# Altium PCB PCB_1_layer.PcbDoc
Units mm, origin at the board's own origin, x right, y up, seen from the top; angles counter-clockwise.
Board outline 56.39 x 40.39 mm, 2 copper layers (Top Layer, Bottom Layer); 13 components, 9 nets, 33 pads, 1 vias.
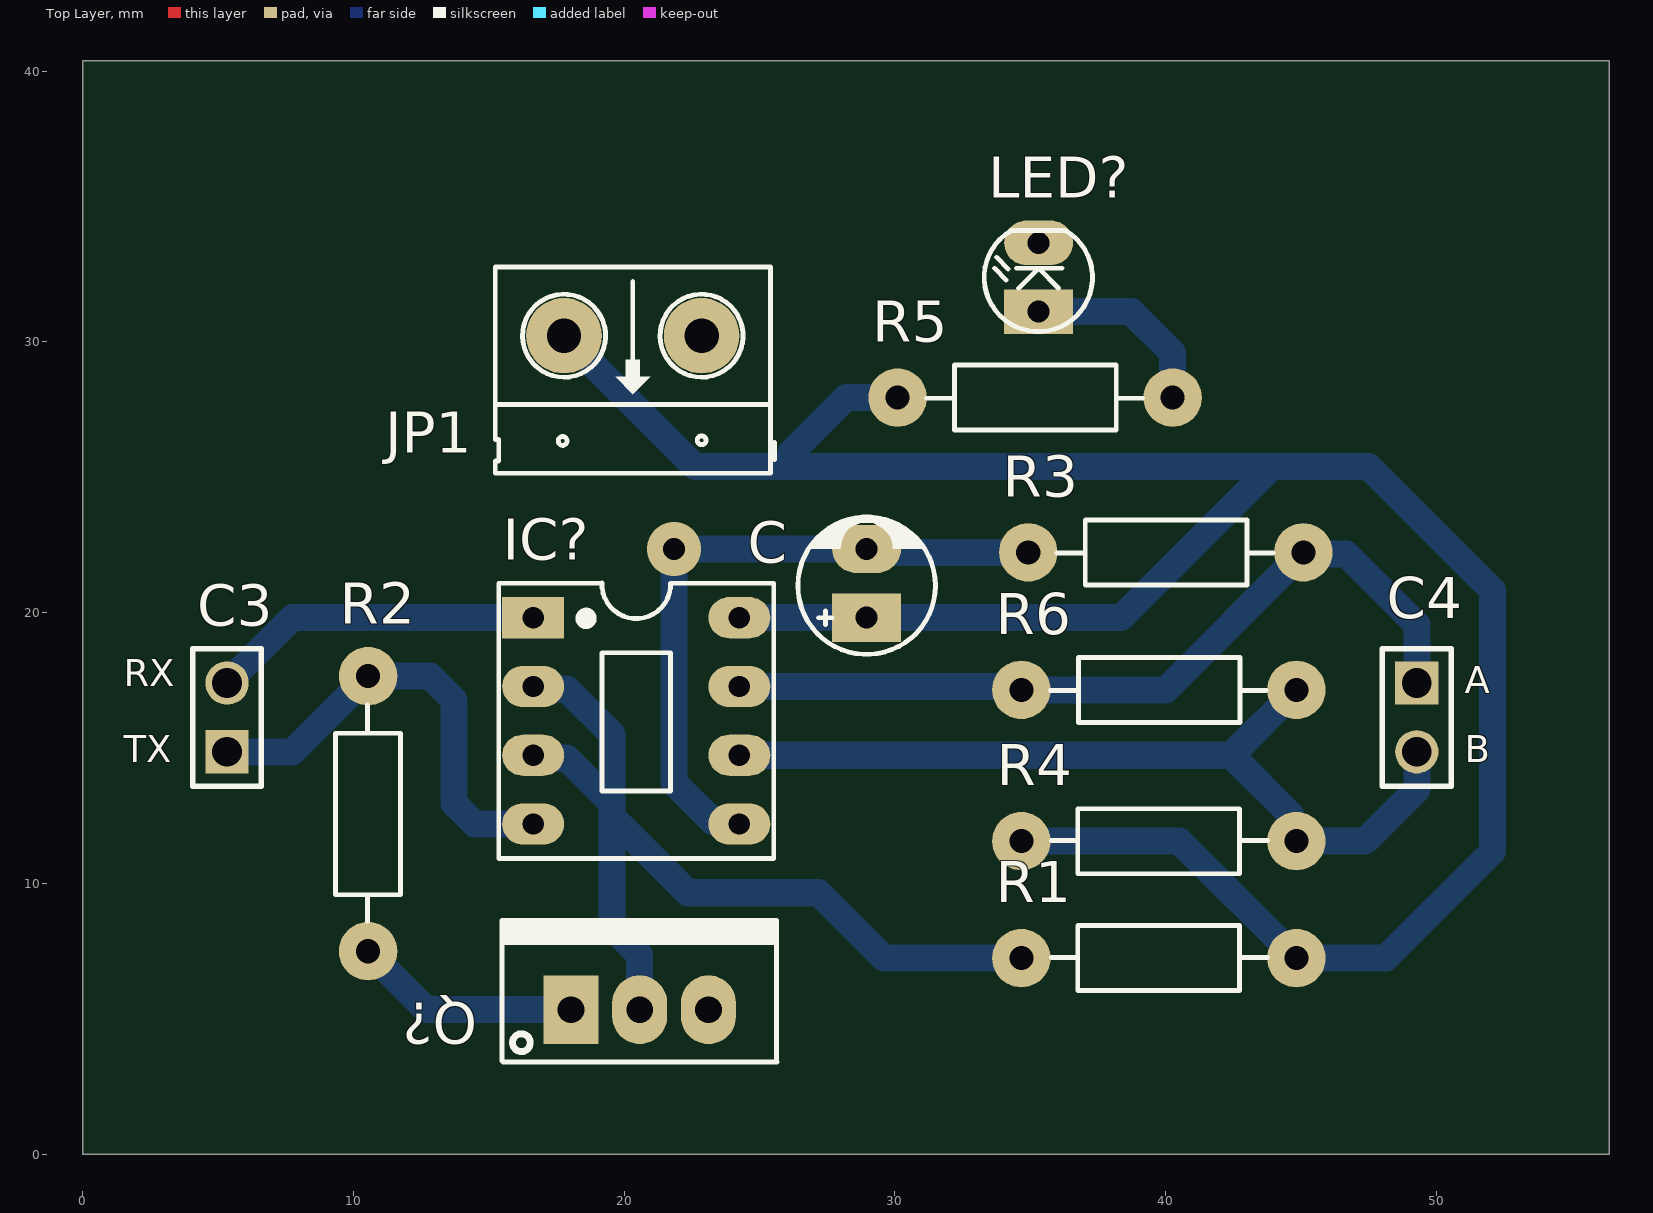
[diagram p0: Top Layer view]
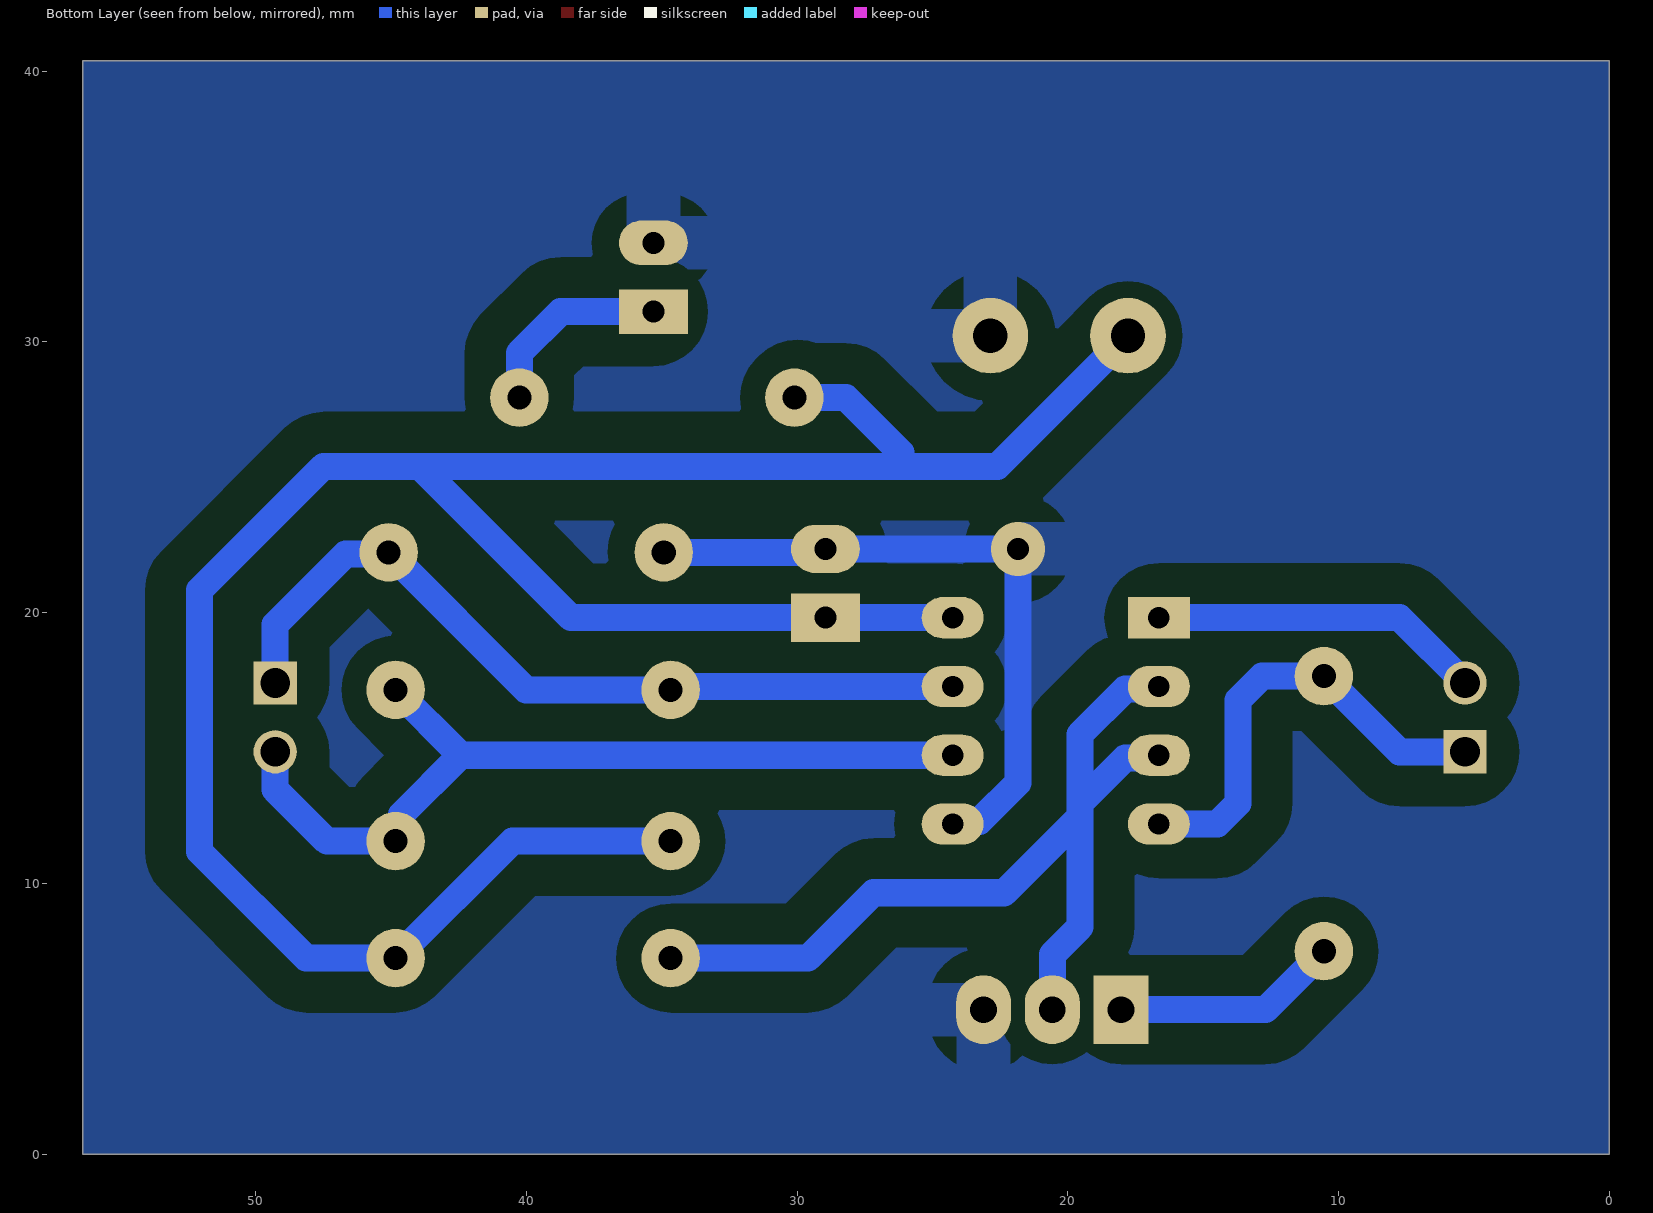
[diagram p1: Bottom Layer view, seen from below]
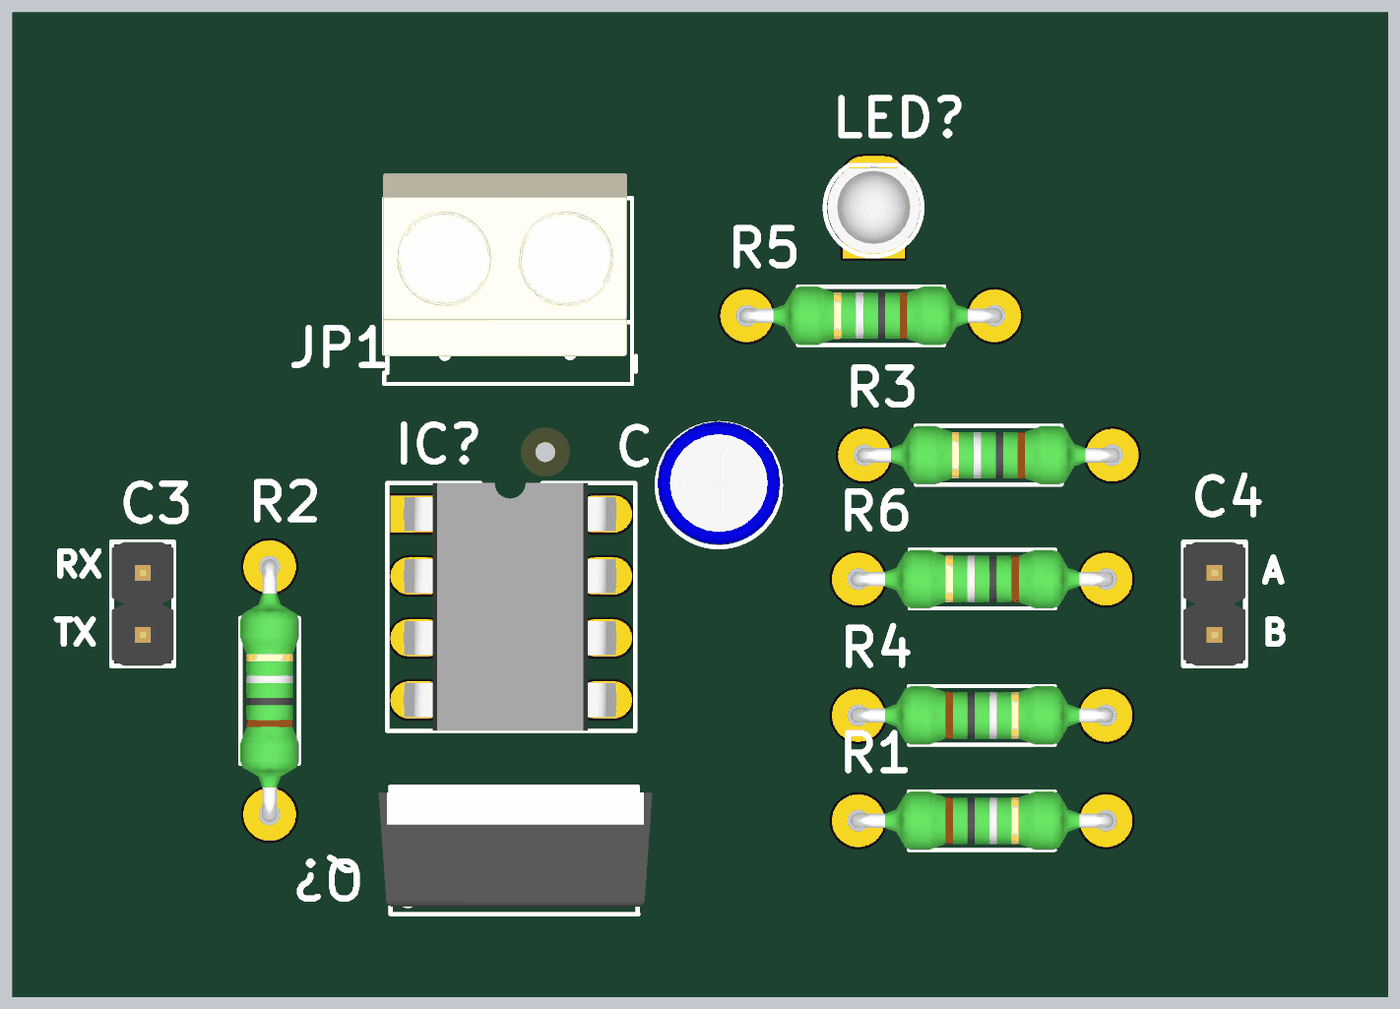
[diagram p2: 3D render of the assembled board from above, using the file's embedded part models]

## Layer stack, top to bottom
Top Solder: solder mask 0.0102, Solder Resist, Dk 3.5
Top Layer: signal copper 0.0356
Dielectric 1: dielectric 0.32, FR-4, Dk 4.8
Bottom Layer: signal copper 0.0356
Bottom Solder: solder mask 0.0102, Solder Resist, Dk 3.5

## Board outline
0,0 56.388,0 56.388,40.386 0,40.386

## Design rules (kind name [scope] priority, off if disabled: settings)
Clearance Clearance_1 [InNamedPolygon('Bottom Layer-No Net')] p1: gap=0.254 ignorepadtopadclearanceinfootprint=FALSE except(0: Arc-Hole Track-Hole SMDPad-Hole THPad-Hole Via-Hole Fill-Hole Poly-Hole Region-Hole Text-Hole; 1.5: Arc-Fill Arc-Poly Arc-Region Track-Fill Track-Poly Track-Region Via-Fill Via-Poly Via-Region Fill-Fill Fill-Poly Fill-Region Poly-Poly Poly-Region Region-Region)
Clearance [All] p2: gap=0.254 ignorepadtopadclearanceinfootprint=FALSE except(0: Arc-Hole Track-Hole SMDPad-Hole THPad-Hole Via-Hole Fill-Hole Poly-Hole Region-Hole Text-Hole; 1.5: Arc-Fill Arc-Poly Arc-Region Track-Fill Track-Poly Track-Region Via-Fill Via-Poly Via-Region Fill-Fill Fill-Poly Fill-Region Poly-Poly Poly-Region Region-Region)
PolygonConnect PolygonConnect_1 [All vs IsNamedPolygon('Bottom Layer-No Net')] p1: connectstyle=Relief reliefconductorwidth=2 reliefentries=4 polygonreliefangle="90 Angle" airgapwidth=1
PolygonConnect [All] p2: connectstyle=Relief reliefconductorwidth=0.254 reliefentries=4 polygonreliefangle="90 Angle" airgapwidth=0.254
RoutingVias [All] p1: holewidth=0.711 width=1.27 viastyle="Through Hole" minholewidth=0.711 minwidth=1.27 maxholewidth=0.711 maxwidth=1.27
SolderMaskExpansion [All] p1: expansion=0.102
Width [All] p1: maxlimit=2 minlimit=0.254 preferedwidth=1 toplayer_maxwidth=0.254 toplayer_prefwidth=0.254 bottomlayer_minwidth=0.5 minimp=50.000000 maximp=50.000000 favimp=50.000000
30 further rules are at their usual default settings.

## Components (designator, comment, footprint, x,y, rotation, side; value= is the part's Value field where it differs from the comment)
C "22uF" CP1/2 28.956,19.812 r90 top value=10uF/50V
C3 "JP2" JP2-D1T 5.334,14.859 r90 top
C4 "JP2" JP2-D1T 49.276,17.399 r270 top
IC? "MAX485" DIP8/W0.3 16.637,19.812 r270 top
JP1 "Header 2_1" HED2 22.86,30.226 r180 top value="Header 2"
LED? "LED" LED-3 35.306,31.115 r90 top value="LED 3 ly Single Colour"
Q? "IRF840" QTO-220 18.034,5.334 r0 top
R1 "10k" RES-1/4W 39.37,7.366 r180 top
R2 "4.7K" RES-1/4W 10.414,12.192 r270 top
R3 "10K" RES-1/4W 40.386,22.098 r0 top
R4 "10K" RES-1/4W 39.37,11.684 r180 top
R5 "220" RES-1/4W 35.56,27.813 r0 top
R6 "120" RES-1/4W 40.132,17.018 r0 top

## Footprints (in the part's own frame and the unit in brackets; to place one, negate y for a bottom-side part, rotate by r counter-clockwise, add the part's x,y. Pads: shape width x height; smd on the part's side, far side on the other; paste and mask are expansions set on the pad)
CP1/2 [mil] "Tu hoa < 22uF/16>50V"
  rect 70x100 hole 32: 1(0,0)
  oval 70x100 hole 32: 2(100,0)
  silkscreen extent -53,-100 146,100, body extent -49,-99 149,99, height 287
DIP8/W0.3 [mil] "8 PIN, W 300mil, Pin to pin 100mil"
  rect 60x90 hole 31: 1(0,0)
  oval 60x90 hole 31: 2(100,0) 3(200,0) 4(300,0) 5(300,300) 6(200,300) 7(100,300) 8(0,300)
  silkscreen extent -50,-50 350,350, body extent -50,-40 350,336, height 201
HED2 [mil] "Header 2, 2 pin, hight 300mil, Pin to Pin 200, Colour Green"
  round 110 hole 50: 1(0,0) 2(200,0)
  silkscreen extent -106,-100 300,200, body extent -92,-140 302,155, height 394
JP2-D1T [mm] "2 pins, 1 row, straight, gold plating"
  rect 1.6x1.6 hole 1.1: 1(0,0)
  round 1.6 hole 1.1: 2(2.54,0)
  silkscreen extent -1.27,-1.27 3.81,1.27, body extent -1.27,-1.27 3.81,1.27, height 8.54
LED-3 [mil] "LED 2 PIN, 3ly Only colour"
  rect 65x100 hole 32: 1(0,0)
  oval 65x100 hole 32: 2(100,0)
  silkscreen extent -29,-78 118,79, body extent -25,-75 113,75, height 217
QTO-220 [mil] "TO-220 - 1-2-3"
  rect 80x100 hole 39: 1(0,0)
  oval 80x100 hole 39: 2(100,0) 3(200,0)
  silkscreen extent -100,-76 300,130, body extent -119,-64 322,121, height 755
RES-1/4W [mil]
  round 85 hole 35: 1(-215,5) 2(185,5)
  silkscreen extent -173,-42 141,52, body extent -227,-42 197,52, height 95

## Part data
C: library part CP1, "Cap P  0,1uF < 22uF , 16 - 50V", Description 1="10 => 220uF/6,3V/10V - 10uF => 100uF/16V", Description 2="0,1uF => 33uF/50V - 10uF => 22uF/63V", Description 3="0,47uF => 10uF/100V"
C3 C4: "WR-PHD 2.54 mm Angled Socket Header", Manufacturer="Würth Elektronik eiSos GmbH", partNo=613002143121, ComponentLink1 Description=Manufacturer, ComponentLink1URL=http://www.we-online.com, ComponentLink2 Description=Datasheet, ComponentLink2URL=http://katalog.we-online.de/em/datasheet/6130xx143121.pdf, Created by="Karrer Zheng", Created Date="29 March 2013", NoPins=02
IC?: "RS232 - RS485 (Same sn75176)"
JP1: "Header, 2-Pin", Manufacturer="Generic Components", Class=Connector
LED?: "LED Single colour Green and Red"
Q?: "MOSFET N - CHANNEL 500V - 0.75 - 8A - TO-220"
R1 R2 R3 R4 R5 R6: library part Res, "Res", Manufacturer="Generic Components", Class=Passive, Published=08/06/2000, Publisher="Altium Hobart Technology Centre", SubClass=R

## Via types
v1: diameter 2, hole 0.8, Top Layer to Bottom Layer, tented both sides, 1 vias

## Nets (pads, with @x,y where several pads share a name; then routed paths per layer and width w, separated by ;. In a path a pad name is that pad's centre, name@x,y a point inside that pad or via, vN(x,y) a via of type N, cw(c..) or ccw(c..) an arc to the next point about the centre after c; other vN are vias at no path point)
GND: C.2 IC?.5 JP1.1 LED?.2 Q?.3 R3.1 | length 25
  Bottom Layer w1: IC?.5 24.157,12.292 23.268,12.292 21.844,13.716 v1(21.844,22.352) C.2 29.083,22.225 R3.1 R3.1@34.798,22.352
NetC4_1: C4.1 IC?.7 R3.2 R6.1 | length 30.4
  Bottom Layer w1: IC?.7 34.544,17.272 R6.1 40.005,17.145 R3.2 45.147,22.163 46.671,22.163 49.276,19.558 C4.1
NetC4_2: C4.2 IC?.6 R4.1 R6.2 | length 32.4
  Bottom Layer w1: IC?.6 42.418,14.732 ; R6.2 42.418,14.732 ; C4.2 49.276,13.462 47.371,11.557 R4.1 44.609,11.779 44.609,12.541 42.418,14.732
NetIC?_2: IC?.2 IC?.3 Q?.2 R1.2 | length 35.2
  Bottom Layer w1: IC?.3 16.737,14.632 17.88,14.632 19.558,12.954 ; IC?.2 16.737,17.172 17.88,17.172 19.558,15.494 19.558,12.954 ; Q?.2 20.574,7.366 19.558,8.382 19.558,12.446 ; R1.2 29.591,7.239 27.178,9.652 22.352,9.652 19.558,12.446 ; 19.558,12.446 19.558,12.954
NetLED?_1: LED?.1 R5.2 | length 7.2
  Bottom Layer w1: LED?.1 38.735,31.115 40.259,29.591 R5.2
NetQ?_1: Q?.1 R2.2 | length 8.4
  Bottom Layer w1: R2.2 12.7,5.334 Q?.1
RX: C3.2 IC?.1 | length 12.3
  Bottom Layer w1: C3.2 7.747,19.812 IC?.1
TX: C3.1 IC?.4 R2.1 | length 17
  Bottom Layer w1: C3.1 7.747,14.859 R2.1 12.827,17.653 13.716,16.764 13.716,12.954 14.478,12.192 IC?.4
VCC: C.1 IC?.8 JP1.2 R1.1 R4.2 R5.1 | length 95.9
  Bottom Layer w1: JP1.2 22.606,25.4 26.162,25.4 ; IC?.8 C.1 38.354,19.812 43.815,25.273 ; R5.1@29.972,28.067 R5.1 28.194,27.94 26.162,25.908 26.162,25.4 ; R4.2 40.513,11.557 R1.1 48.133,7.239 52.07,11.176 52.07,20.828 47.498,25.4 26.162,25.4

## Polygon pours and split planes (outlines as drawn)
GND on Bottom Layer "Bottom Layer-No Net" (solid, pour order 0): 0,0 56.388,0 56.388,40.386 0,40.386

## Silkscreen, mask and mechanical layers (free items; w line width, h text height)
Top Overlay:
  text "RX" at 1.524,17.272 h1
  text "A" at 51.054,17.018 h1
  text "TX" at 1.524,14.478 h1
  text "B" at 51.054,14.478 h1